# Altium PCB classyTKL_ALPS.PcbDoc (part 1 of 2)
Units mm, origin at the board's own origin, x right, y up, seen from the top; angles counter-clockwise.
Board outline 346.59 x 122.85 mm, 2 copper layers (Component Side, Bottom Layer), stack 1.571 mm thick; 201 components, 128 nets, 679 pads, 47 vias.
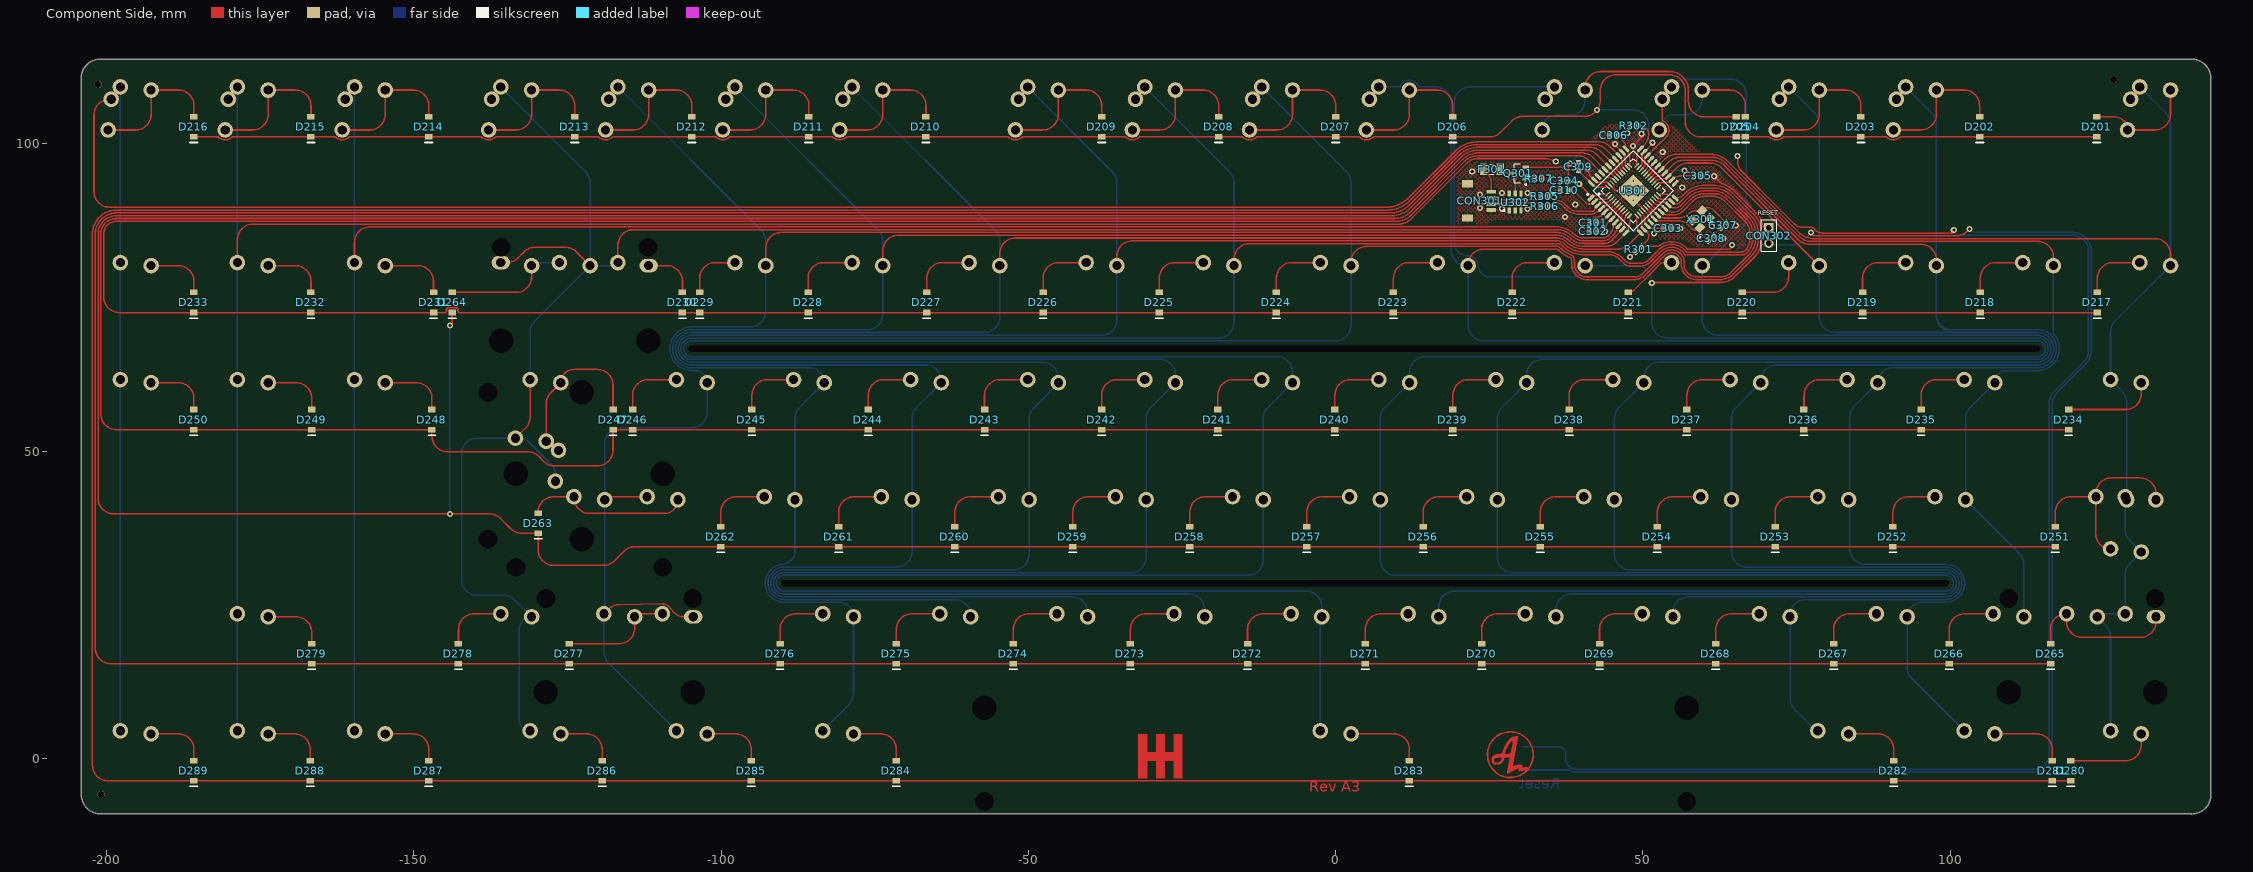
[diagram p0: Component Side view]
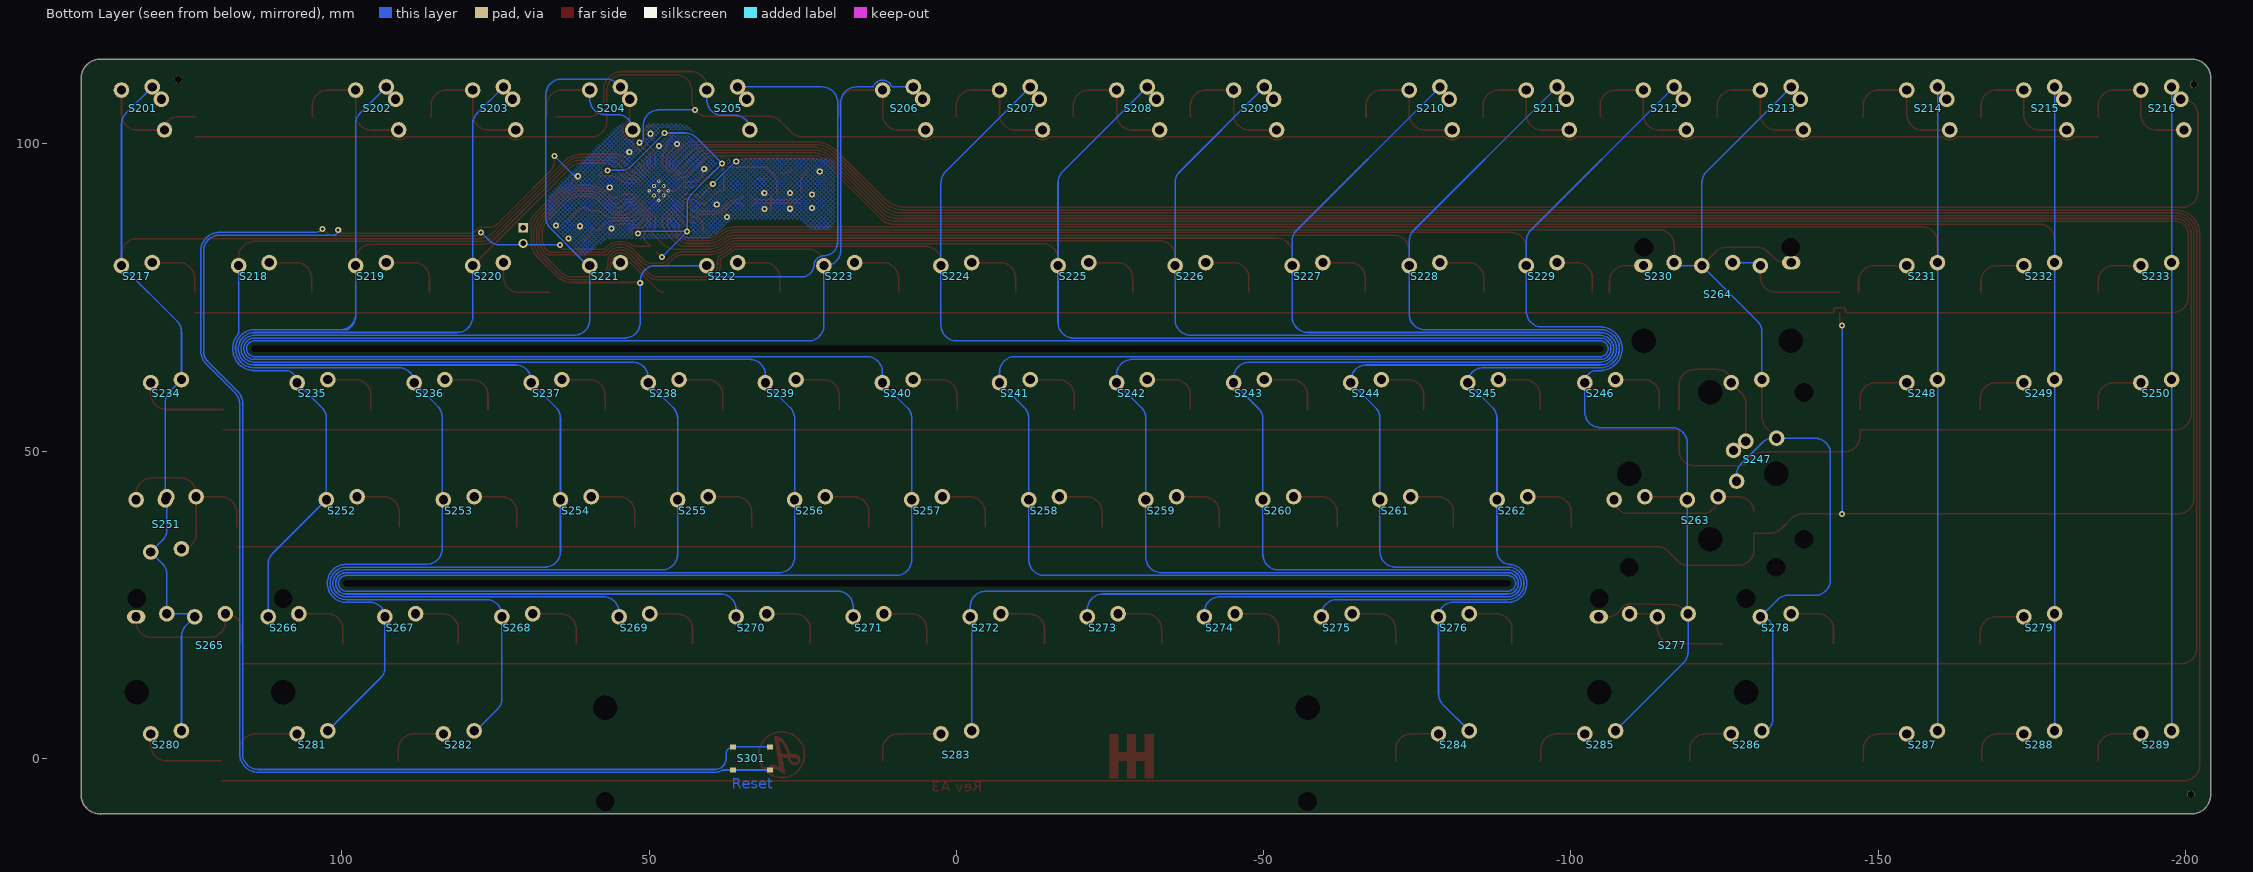
[diagram p1: Bottom Layer view, seen from below]
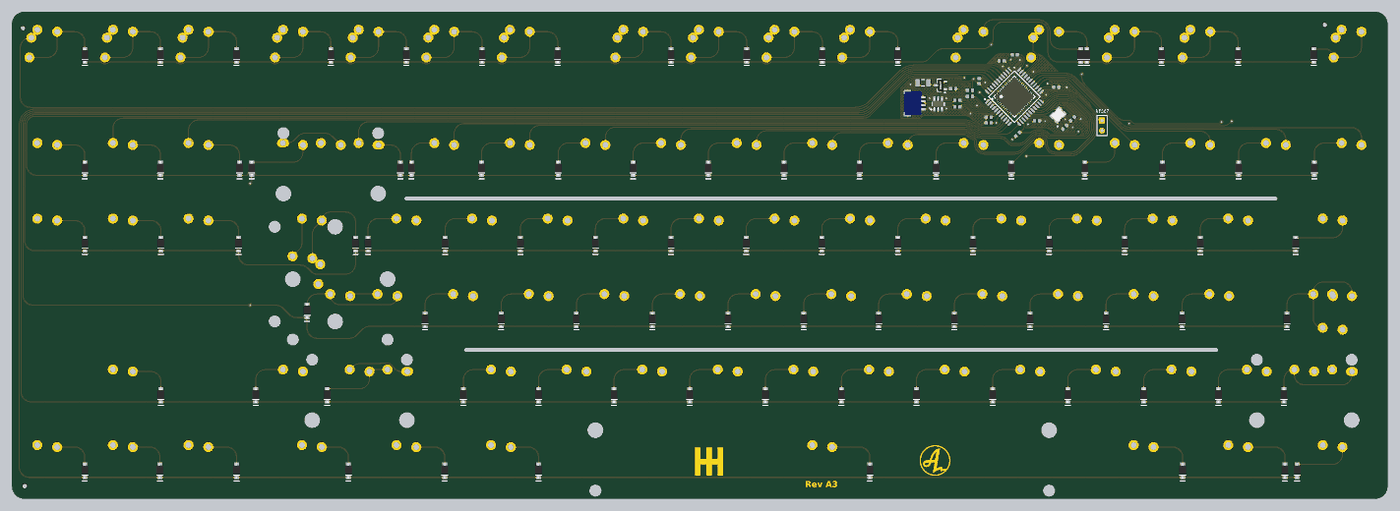
[diagram p3: 3D render of the assembled board from above, using the file's embedded part models]

## Layer stack, top to bottom
Top Solder: solder mask 0.0102, Solder Resist, Dk 3.5
Component Side: signal copper 0.0356
Dielectric 1: core 1.5, FR-4, Dk 4.2
Bottom Layer: signal copper 0.0356
Solder Side: solder mask 0.0102, Solder Resist, Dk 3.5

## Board outline
-204.127,-5.981 cw(c-204.032,-5.896) -204.159,-5.896 -204.159,110.685 cw(c-201.032,110.685) -201.032,113.812 cw(c-201.032,113.685) -200.974,113.798 139.295,113.798 cw(c139.295,110.671) 142.423,110.671 142.423,-5.883 cw(c142.299,-5.915) 142.427,-5.915 cw(c139.299,-5.915) 139.299,-9.042 cw(c139.299,-8.915) 139.233,-9.023 -201,-9.023 cw(c-201,-5.896)

## Design rules (kind name [scope] priority, off if disabled: settings)
Clearance [All] p1: gap=0.2 ignorepadtopadclearanceinfootprint=FALSE except(0: Arc-Hole Track-Hole SMDPad-Hole THPad-Hole Via-Hole Fill-Hole Poly-Hole Region-Hole Text-Hole; 0.254: THPad-THPad THPad-Via THPad-Fill THPad-Poly THPad-Region THPad-Text Via-Via Via-Fill Via-Poly Via-Region Via-Text Fill-Fill Fill-Poly Fill-Region Fill-Text Poly-Poly Poly-Region Poly-Text Region-Region Region-Text Text-Text)
ComponentClearance [InComponent('No Component') And OnLayer('Component Side')] p1: gap=0.254 collisioncheckmode=3 verticalgap=0.254 showdistances=FALSE
DiffPairsRouting DiffPairsRouting_USB [InDifferentialPairClass('All Differential Pairs')] p1: maxlimit=0.254 minlimit=0.203 mostfreqgap=0.203 toplayer_minwidth=0.152 toplayer_maxwidth=0.381 toplayer_prefwidth=0.152 bottomlayer_minwidth=0.152 bottomlayer_maxwidth=0.381 bottomlayer_prefwidth=0.152 maxuncoupledlength=12.7
DiffPairsRouting [All] p2: maxlimit=0.254 minlimit=0.254 mostfreqgap=0.254 toplayer_minwidth=0.381 toplayer_maxwidth=0.381 toplayer_prefwidth=0.381 bottomlayer_minwidth=0.381 bottomlayer_maxwidth=0.381 bottomlayer_prefwidth=0.381 maxuncoupledlength=12.7
HoleSize [All] p1: absolutevalues=TRUE maxlimit=20 minlimit=0.025 maxpercent=80.000 minpercent=20.000
MatchedLengths MatchedLengths_USB_DiffPairs_1 [All] p1: tolerance=0.127 checknetsindiffpair=TRUE checkdiffpairvsdiffpair=FALSE checkxsignals=FALSE checkothers=FALSE
MatchedLengths MatchedLengths_USB_DiffPairs [All] p2: tolerance=0.127 checknetsindiffpair=TRUE checkdiffpairvsdiffpair=FALSE checkxsignals=FALSE checkothers=FALSE
PolygonConnect PolygonConnect_1 [All vs IsVia] p1: connectstyle=Direct reliefconductorwidth=0.254 reliefentries=4 polygonreliefangle="90 Angle" airgapwidth=0.254
PolygonConnect [All] p2: connectstyle=Relief reliefconductorwidth=0.254 reliefentries=4 polygonreliefangle="90 Angle" airgapwidth=0.254
RoutingVias [All] p1: holewidth=0.711 width=1.27 viastyle="Through Hole" minholewidth=0.711 minwidth=1.27 maxholewidth=0.711 maxwidth=1.27
SolderMaskExpansion [All] p1: expansion=0.102 istentingtop=FALSE
Width [All] p1: maxlimit=0.254 minlimit=0.203 preferedwidth=0.254
27 further rules are at their usual default settings.

## Classes and differential pairs
component class Designator: C201 C202 C203 C204 C205 C206 D201 D202 D203 D204 D205 D206 D207 D208 D209 D210 D211 D212 D213 D214 D215 D216 D217 D218 D219 D220 D221 D222 D223 D224 D225 D226 D227 D228 D229 D230 D231 D232 D233 D234 D235 D236 D237 D238 D239 D240 D241 D242 D243 D244 D245 D246 D247 D248 D249 D250 D251 D252 D253 D254 D255 D256 D257 D258 D259 D260 D261 D262 D263 D264 D265 D266 D267 D268 D269 D270 D271 D272 D273 D274 D275 D276 D277 D278 D279 D280 D281 D282 D283 D284 D285 D286 D287 D288 D289 S201 S202 S203 S204 S205 S206 S207 S208 S209 S210 S211 S212 S213 S214 S215 S216 S217 S218 S219 S220 S221 S222 S223 S224 S225 S226 S227 S228 S229 S230 S231 S232 S233 S234 S235 S236 S237 S238 S239 S240 S241 S242 S243 S244 S245 S246 S247 S248 S249 S250 S251 S252 S253 S254 S255 S256 S257 S258 S259 S260 S261 S262 S263 S264 S265 S266 S267 S268 S269 S270 S271 S272 S273 S274 S275 S276 S277 S278 S279 S280 S281 S282 S283 S284 S285 S286 S287 S288 S289
differential pair D_PRE: +D_PRE_P -D_PRE_N
differential pair D: +D_P -D_N

## Components (designator, comment, footprint, x,y, rotation, side; value= is the part's Value field where it differs from the comment)
C301 "" C0603[1608] 41.915,87.178 r0 top value=1uF
C302 "" C0603[1608] 41.915,85.781 r0 top value=0.1uF
C303 "" C0603[1608] 54.107,86.289 r180 top value=0.1uF
C304 "" C0603[1608] 37.211,93.98 r0 top value=4,7uF
C305 "" C0603[1608] 58.933,94.798 r180 top value=0.1uF
C306 "" C0603[1608] 45.217,101.402 r0 top value=0.1uF
C307 "" C0603[1608] 63.076,86.749 r45 top value=15pF
C308 "" C0603[1608] 61.092,84.638 r225 top value=15pF
C309 "" C0603[1608] 39.502,96.322 r270 top value=0.1uF
C310 "" C0603[1608] 37.211,92.456 r0 top value=0.1uF
CON301 "Header 5" "JST SM04B-SRSS-TB" 21.468,93.54 r270 top
CON302 "Header 2" HDR1X2 70.485,86.36 r270 top
D201 "Diode" SOD-123 123.83,102.775 r90 top
D202 "Diode" SOD-123 104.78,102.775 r90 top
D203 "Diode" SOD-123 85.476,102.775 r90 top
D204 "Diode" SOD-123 66.68,102.775 r90 top
D205 "Diode" SOD-123 65.151,102.775 r90 top
D206 "Diode" SOD-123 19.055,102.775 r90 top
D207 "Diode" SOD-123 0.005,102.775 r90 top
D208 "Diode" SOD-123 -19.045,102.775 r90 top
D209 "Diode" SOD-123 -38.095,102.775 r90 top
D210 "Diode" SOD-123 -66.67,102.775 r90 top
D211 "Diode" SOD-123 -85.72,102.775 r90 top
D212 "Diode" SOD-123 -104.77,102.775 r90 top
D213 "Diode" SOD-123 -123.82,102.775 r90 top
D214 "Diode" SOD-123 -147.569,102.775 r90 top
D215 "Diode" SOD-123 -166.746,102.775 r90 top
D216 "Diode" SOD-123 -185.796,102.775 r90 top
D217 "Diode" SOD-123 123.957,74.2 r90 top
D218 "Diode" SOD-123 104.907,74.2 r90 top
D219 "Diode" SOD-123 85.73,74.2 r90 top
D220 "Diode" SOD-123 66.172,74.2 r90 top
D221 "Diode" SOD-123 47.63,74.2 r90 top
D222 "Diode" SOD-123 28.707,74.2 r90 top
D223 "Diode" SOD-123 9.403,74.2 r90 top
D224 "Diode" SOD-123 -9.647,74.2 r90 top
D225 "Diode" SOD-123 -28.697,74.2 r90 top
D226 "Diode" SOD-123 -47.62,74.2 r90 top
D227 "Diode" SOD-123 -66.543,74.2 r90 top
D228 "Diode" SOD-123 -85.847,74.2 r90 top
D229 "Diode" SOD-123 -103.5,74.2 r90 top
D230 "Diode" SOD-123 -106.294,74.2 r90 top
D231 "Diode" SOD-123 -146.807,74.2 r90 top
D232 "Diode" SOD-123 -166.746,74.2 r90 top
D233 "Diode" SOD-123 -185.796,74.2 r90 top
D234 "Diode" SOD-123 119.258,55.15 r90 top
D235 "Diode" SOD-123 95.255,55.15 r90 top
D236 "Diode" SOD-123 76.205,55.15 r90 top
D237 "Diode" SOD-123 57.155,55.15 r90 top
D238 "Diode" SOD-123 37.978,55.15 r90 top
D239 "Diode" SOD-123 19.055,55.15 r90 top
D240 "Diode" SOD-123 -0.122,55.15 r90 top
D241 "Diode" SOD-123 -19.172,55.15 r90 top
D242 "Diode" SOD-123 -38.095,55.15 r90 top
D243 "Diode" SOD-123 -57.145,55.15 r90 top
D244 "Diode" SOD-123 -76.068,55.15 r90 top
D245 "Diode" SOD-123 -94.991,55.15 r90 top
D246 "Diode" SOD-123 -114.422,55.15 r90 top
D247 "Diode" SOD-123 -117.597,55.15 r90 top
D248 "Diode" SOD-123 -147.061,55.15 r90 top
D249 "Diode" SOD-123 -166.619,55.15 r90 top
D250 "Diode" SOD-123 -185.796,55.15 r90 top
D251 "Diode" SOD-123 117.099,36.1 r90 top
D252 "Diode" SOD-123 90.683,36.1 r90 top
D253 "Diode" SOD-123 71.506,36.1 r90 top
D254 "Diode" SOD-123 52.329,36.1 r90 top
D255 "Diode" SOD-123 33.279,36.1 r90 top
D256 "Diode" SOD-123 14.229,36.1 r90 top
D257 "Diode" SOD-123 -4.694,36.1 r90 top
D258 "Diode" SOD-123 -23.744,36.1 r90 top
D259 "Diode" SOD-123 -42.794,36.1 r90 top
D260 "Diode" SOD-123 -61.971,36.1 r90 top
D261 "Diode" SOD-123 -80.894,36.1 r90 top
D262 "Diode" SOD-123 -100.071,36.1 r90 top
D263 "Diode" SOD-123 -129.789,38.283 r90 top
D264 "Diode" SOD-123 -143.759,74.2 r90 top
D265 "Diode" SOD-123 116.332,17.05 r90 top
D266 "Diode" SOD-123 99.827,17.05 r90 top
D267 "Diode" SOD-123 81.031,17.05 r90 top
D268 "Diode" SOD-123 61.854,17.05 r90 top
D269 "Diode" SOD-123 42.931,17.05 r90 top
D270 "Diode" SOD-123 23.754,17.05 r90 top
D271 "Diode" SOD-123 4.831,17.05 r90 top
D272 "Diode" SOD-123 -14.346,17.05 r90 top
D273 "Diode" SOD-123 -33.396,17.05 r90 top
D274 "Diode" SOD-123 -52.446,17.05 r90 top
D275 "Diode" SOD-123 -71.496,17.05 r90 top
D276 "Diode" SOD-123 -90.419,17.05 r90 top
D277 "Diode" SOD-123 -124.709,17.05 r90 top
D278 "Diode" SOD-123 -142.743,17.05 r90 top
D279 "Diode" SOD-123 -166.619,17.05 r90 top
D280 "Diode" SOD-123 119.639,-2 r90 top
D281 "Diode" SOD-123 116.591,-2 r90 top
D282 "Diode" SOD-123 90.81,-2 r90 top
D283 "Diode" SOD-123 12,-2 r90 top
D284 "Diode" SOD-123 -71.496,-2 r90 top
D285 "Diode" SOD-123 -95.118,-2 r90 top
D286 "Diode" SOD-123 -119.375,-2 r90 top
D287 "Diode" SOD-123 -147.569,-2 r90 top
D288 "Diode" SOD-123 -166.873,-2 r90 top
D289 "Diode" SOD-123 -185.796,-2 r90 top
F301 "Fuse" C1206[3216] 25.4,95.885 r0 top
Q301 "PMOS-2" SOT-23-3 29.718,95.25 r180 top
R301 "Res1" R0603[1608] 49.281,82.86 r45 top value=10K
R302 "Res1" R0603[1608] 48.514,102.997 r180 top value=10K
R305 "Res1" R0603[1608] 34.041,91.496 r180 top value=22
R306 "Res1" R0603[1608] 34.041,89.845 r180 top value=22
R307 "Res1" R0603[1608] 33.02,94.361 r0 top value=10K
S201 "MX" "Alps-switch - AEK F-row" 133.349,104.775 r180 bottom locked
S202 "MX" "Alps-switch - AEK F-row" 95.249,104.775 r180 bottom locked
S203 "MX" "Alps-switch - AEK F-row" 76.199,104.775 r180 bottom locked
S204 "MX" "Alps-switch - AEK F-row" 57.149,104.775 r180 bottom locked
S205 "MX" "Alps-switch - AEK F-row" 38.099,104.775 r180 bottom locked
S206 "MX" "Alps-switch - AEK F-row" 9.494,104.775 r180 bottom locked
S207 "MX" "Alps-switch - AEK F-row" -9.526,104.775 r180 bottom locked
S208 "MX" "Alps-switch - AEK F-row" -28.576,104.775 r180 bottom locked
S209 "MX" "Alps-switch - AEK F-row" -47.626,104.775 r180 bottom locked
S210 "MX" "Alps-switch - AEK F-row" -76.201,104.775 r180 bottom locked
S211 "MX" "Alps-switch - AEK F-row" -95.251,104.775 r180 bottom locked
S212 "MX" "Alps-switch - AEK F-row" -114.301,104.775 r180 bottom locked
S213 "MX" "Alps-switch - AEK F-row" -133.351,104.775 r180 bottom locked
S214 "MX" "Alps-switch - AEK F-row" -157.162,104.775 r180 bottom locked
S215 "MX" "Alps-switch - AEK F-row" -176.213,104.775 r180 bottom locked
S216 "MX" "Alps-switch - AEK F-row" -195.263,104.775 r180 bottom locked
S217 "MX" "Alps-switch - switched pol" 133.349,76.2 r180 bottom locked
S218 "MX" "Alps-switch - switched pol" 114.299,76.2 r180 bottom locked
S219 "MX" "Alps-switch - switched pol" 95.249,76.2 r180 bottom locked
S220 "MX" "Alps-switch - switched pol" 76.199,76.2 r180 bottom locked
S221 "MX" "Alps-switch - switched pol" 57.149,76.2 r180 bottom locked
S222 "MX" "Alps-switch - switched pol" 38.099,76.2 r180 bottom locked
S223 "MX" "Alps-switch - switched pol" 19.049,76.2 r180 bottom locked
S224 "MX" "Alps-switch - switched pol" -0.001,76.2 r180 bottom locked
S225 "MX" "Alps-switch - switched pol" -19.051,76.2 r180 bottom locked
S226 "MX" "Alps-switch - switched pol" -38.101,76.2 r180 bottom
S227 "MX" "Alps-switch - switched pol" -57.151,76.2 r180 bottom locked
S228 "MX" "Alps-switch - switched pol" -76.201,76.2 r180 bottom locked
S229 "MX" "Alps-switch - switched pol" -95.251,76.2 r180 bottom locked
S230 "MX" Alps-switch#1 -114.301,76.2 r180 bottom locked
S231 "MX" Alps-switch#2 -157.162,76.2 r180 bottom locked
S232 "MX" Alps-switch#2 -176.213,76.2 r180 bottom locked
S233 "MX" Alps-switch#2 -195.263,76.2 r180 bottom locked
S234 "MX" "ALPS-switch - 1.5U" 128.587,57.15 r180 bottom locked
S235 "MX" "Alps-switch - switched pol" 104.774,57.15 r180 bottom locked
S236 "MX" "Alps-switch - switched pol" 85.724,57.15 r180 bottom locked
S237 "MX" "Alps-switch - switched pol" 66.674,57.15 r180 bottom locked
S238 "MX" "Alps-switch - switched pol" 47.624,57.15 r180 bottom locked
S239 "MX" "Alps-switch - switched pol" 28.574,57.15 r180 bottom locked
S240 "MX" "Alps-switch - switched pol" 9.524,57.15 r180 bottom locked
S241 "MX" "Alps-switch - switched pol" -9.526,57.15 r180 bottom locked
S242 "MX" "Alps-switch - switched pol" -28.576,57.15 r180 bottom locked
S243 "MX" "Alps-switch - switched pol" -47.626,57.15 r180 bottom locked
S244 "MX" "Alps-switch - switched pol" -66.676,57.15 r180 bottom locked
S245 "MX" "Alps-switch - switched pol" -85.726,57.15 r180 bottom locked
S246 "MX" "Alps-switch - switched pol" -104.776,57.15 r180 bottom
S247 "MX" "ALPS-SWITCH - PIPE_ISO_ENTER" -128.588,57.15 r0 bottom locked
S248 "MX" Alps-switch#2 -157.162,57.15 r180 bottom locked
S249 "MX" Alps-switch#2 -176.213,57.15 r180 bottom locked
S250 "MX" Alps-switch#2 -195.263,57.15 r180 bottom locked
S251 "MX" "ALPS-switch - CAPS" 126.206,38.1 r180 bottom locked
S252 "MX" "Alps-switch - switched pol" 100.012,38.1 r180 bottom locked
S253 "MX" "Alps-switch - switched pol" 80.962,38.1 r180 bottom locked
S254 "MX" "Alps-switch - switched pol" 61.912,38.1 r180 bottom locked
S255 "MX" "Alps-switch - switched pol" 42.862,38.1 r180 bottom locked
S256 "MX" "Alps-switch - switched pol" 23.812,38.1 r180 bottom locked
S257 "MX" "Alps-switch - switched pol" 4.762,38.1 r180 bottom locked
S258 "MX" "Alps-switch - switched pol" -14.288,38.1 r180 bottom locked
S259 "MX" "Alps-switch - switched pol" -33.338,38.1 r180 bottom locked
S260 "MX" "Alps-switch - switched pol" -52.388,38.1 r180 bottom locked
S261 "MX" "Alps-switch - switched pol" -71.438,38.1 r180 bottom locked
S262 "MX" "Alps-switch - switched pol" -90.488,38.1 r180 bottom locked
S263 "MX" "ALPS-SWITCH - ENTER_ANSI_ISO_KEY" -121.451,38.1 r180 bottom locked
S264 "MX" "ALPS-switch - backspace" -123.826,76.2 r180 bottom locked
S265 "MX" "ALPS-switch - Left shift V2" 121.443,19.05 r180 bottom locked
S266 "MX" "Alps-switch - switched pol" 109.479,19.05 r180 bottom locked
S267 "MX" "Alps-switch - switched pol" 90.487,19.05 r180 bottom locked
S268 "MX" "Alps-switch - switched pol" 71.437,19.05 r180 bottom locked
S269 "MX" "Alps-switch - switched pol" 52.387,19.05 r180 bottom locked
S270 "MX" "Alps-switch - switched pol" 33.337,19.05 r180 bottom locked
S271 "MX" "Alps-switch - switched pol" 14.287,19.05 r180 bottom locked
S272 "MX" "Alps-switch - switched pol" -4.763,19.05 r180 bottom locked
S273 "MX" "Alps-switch - switched pol" -23.813,19.05 r180 bottom locked
S274 "MX" "Alps-switch - switched pol" -42.862,19.05 r180 bottom locked
S275 "MX" "Alps-switch - switched pol" -61.913,19.05 r180 bottom locked
S276 "MX" "Alps-switch - switched pol" -80.963,19.05 r180 bottom locked
S277 "MX" "ALPS-switch - right shift V2" -116.581,19.05 r180 bottom locked
S278 "MX" "Alps-switch - switched pol" -133.351,19.05 r180 bottom locked
S279 "MX" Alps-switch#2 -176.213,19.05 r180 bottom locked
S280 "MX" "ALPS-switch - 1.5U" 128.587,0 r180 bottom locked
S281 "MX" Alps-switch#2 104.775,0 r180 bottom
S282 "MX" "ALPS-switch - 1.5U" 80.962,0 r180 bottom
S283 "MX" "ALPS-SWITCH - 7U SPACE" 0,0 r0 bottom locked
S284 "MX" "ALPS-switch - 1.5U" -80.962,0 r180 bottom
S285 "MX" Alps-switch#2 -104.775,0 r180 bottom
S286 "MX" "ALPS-switch - 1.5U" -128.588,0 r180 bottom locked
S287 "MX" Alps-switch#2 -157.163,0 r180 bottom locked
S288 "MX" Alps-switch#2 -176.213,0 r180 bottom locked
S289 "MX" Alps-switch#2 -195.263,0 r180 bottom locked
S301 "SW-PB" "XKB Switch" 33.337,0 r180 bottom
U301 "ATMEGA32U4" ATMEGA32U4-COMBO 48.411,92.392 r45 top
U302 "SRV05" SOT-23-6 29.21,90.551 r90 top
X301 "XTAL" XTAL-3225 59.436,87.757 r45 top

## Footprints (in the part's own frame and the unit in brackets; to place one, negate y for a bottom-side part, rotate by r counter-clockwise, add the part's x,y. Pads: shape width x height; smd on the part's side, far side on the other; paste and mask are expansions set on the pad)
Alps-switch#1 [mm]
  oval 3x2.2 hole 1.499 mask+0.102: 1(-2.5,4)
  round 2.54 hole 1.499 mask+0.102: 2(2.5,4.5)
  round 1 on Mech14: ""(0,0)
Alps-switch#2 [mm]
  round 2.54 hole 1.499 mask+0.102: 1(-2.5,4) 2(2.5,4.5)
  round 1 on Mech14: ""(0,0)
"ALPS-switch - 1.5U" [mm]
  round 2.54 hole 1.499 mask+0.102: 1(-2.5,4) 2(2.5,4.5)
  round 1 on Mech14: ""(0,0)
"ALPS-SWITCH - 7U SPACE" [mil]
  round 100 hole 59 mask+4: 1(98.43,-157.48) 2(-98.43,-177.17)
  round 60 hole 157.01 unplated: ""(-2250,-325) ""(2250,-325)
  round 60 hole 120 unplated: ""(-2250,275) ""(2250,275)
  round 39.37 on Mech14: ""(0,0)
"Alps-switch - AEK F-row" [mm]
  round 2.54 hole 1.499 mask+0.102: 1(-2.5,4) 1(4.5,-2.5) 2(2.5,4.5) 2(4,2.5)
  round 1 on Mech14: ""(0,0)
"ALPS-switch - backspace" [mil]
  round 100 hole 59 mask+4: 1(98.43,177.17) 1(276.57,157.48) 2(-98.43,157.48)
  oval 118.11x86.61 hole 59 mask+4: 2(473.43,177.17)
  round 60 hole 157.01 unplated: ""(-470,-325) ""(470,-325)
  round 60 hole 120 unplated: ""(-470,275) ""(470,275)
  round 39.37 on Mech14: ""(0,0) ""(375,0)
"ALPS-switch - CAPS" [mm]
  round 2.54 hole 1.499 mask+0.102: 1(-7.263,4) 1(0.119,-4) 1(2.5,4.5) 2(-4.881,-4.5) 2(-2.5,4) 2(-2.262,4.5)
  round 1 on Mech14: ""(-4.763,0) ""(-2.381,0) ""(0,0)
"ALPS-SWITCH - ENTER_ANSI_ISO_KEY" [mil]
  round 100 hole 59 mask+4: 1(-567.18,157.48) 1(98.43,177.17) 2(-370.32,177.17) 2(-98.43,157.48)
  round 60 hole 120 unplated: ""(-470,-275) ""(470,-275)
  round 60 hole 157.01 unplated: ""(-470,325) ""(470,325)
  round 39.37 on Mech14: ""(-468.75,0) ""(-468.75,0) ""(0,0) ""(0,0)
"ALPS-switch - Left shift V2" [mil]
  oval 118.11x86.61 hole 59 mask+4.02: 1(-473.43,157.48)
  round 100 hole 59 mask+4: 1(98.43,177.17) 2(-276.57,177.17)
  round 100 hole 59 mask+4.02: 2(-98.43,157.48)
  round 60 hole 157.01 unplated: ""(-470,-325) ""(470,-325)
  round 60 hole 120 unplated: ""(-470,275) ""(470,275)
  round 39.37 on Mech14: ""(-375,0) ""(0,0)
"ALPS-SWITCH - PIPE_ISO_ENTER" [mil]
  round 100 hole 59 mask+4: 1(4.68,217.52) 1(83.42,276.57) 1(98.43,-157.48) 2(-192.18,197.83) 2(-98.43,-177.17) 2(63.73,473.43)
  round 60 hole 120 unplated: ""(-368.75,-95) ""(-368.75,845)
  round 39.37 on Mech14: ""(-93.75,375) ""(-93.75,375) ""(0,0) ""(0,0)
  round 60 hole 157.01 unplated: ""(231.25,-95) ""(231.25,845)
"ALPS-switch - right shift V2" [mil]
  round 100 hole 59 mask+4: 1(-276.57,177.17) 1(-98.43,157.48) 2(98.43,177.17)
  oval 118.11x86.61 hole 59 mask+4: 2(-473.43,157.48)
  round 60 hole 157.01 unplated: ""(-470,-325) ""(470,-325)
  round 60 hole 120 unplated: ""(-470,275) ""(470,275)
  round 39.37 on Mech14: ""(-375,0) ""(0,0)
"Alps-switch - switched pol" [mm]
  round 2.54 hole 1.499 mask+0.102: 1(2.5,4.5) 2(-2.5,4)
  round 1 on Mech14: ""(0,0)
ATMEGA32U4-COMBO [mm] "QFP, 44-Leads, Body 9,95x9,95mm, Pitch 0,80mm, IPC Medium Density"
  rect 1.35x0.5 smd: 1(-5.675,4)
  oval 1.05x0.25 smd: 1(-3.325,2.5) 2(-3.325,2) 3(-3.325,1.5) 4(-3.325,1) 5(-3.325,0.5) 6(-3.325,0) 7(-3.325,-0.5) 8(-3.325,-1) 9(-3.325,-1.5) 10(-3.325,-2) 11(-3.325,-2.5) 23(3.325,-2.5) 24(3.325,-2) 25(3.325,-1.5) 26(3.325,-1) 27(3.325,-0.5) 28(3.325,0) 29(3.325,0.5) 30(3.325,1) 31(3.325,1.5) 32(3.325,2) 33(3.325,2.5)
  oval 1.35x0.5 smd: 2(-5.675,3.2) 3(-5.675,2.4) 4(-5.675,1.6) 5(-5.675,0.8) 6(-5.675,0) 7(-5.675,-0.8) 8(-5.675,-1.6) 9(-5.675,-2.4) 10(-5.675,-3.2) 11(-5.675,-4) 23(5.675,-4) 24(5.675,-3.2) 25(5.675,-2.4) 26(5.675,-1.6) 27(5.675,-0.8) 28(5.675,0) 29(5.675,0.8) 30(5.675,1.6) 31(5.675,2.4) 32(5.675,3.2) 33(5.675,4)
  oval 0.5x1.35 smd: 12(-4,-5.675) 13(-3.2,-5.675) 14(-2.4,-5.675) 15(-1.6,-5.675) 16(-0.8,-5.675) 17(0,-5.675) 18(0.8,-5.675) 19(1.6,-5.675) 20(2.4,-5.675) 21(3.2,-5.675) 22(4,-5.675) 34(4,5.675) 35(3.2,5.675) 36(2.4,5.675) 37(1.6,5.675) 38(0.8,5.675) 39(0,5.675) 40(-0.8,5.675) 41(-1.6,5.675) 42(-2.4,5.675) 43(-3.2,5.675) 44(-4,5.675)
  oval 0.25x1.05 smd: 12(-2.5,-3.325) 13(-2,-3.325) 14(-1.5,-3.325) 15(-1,-3.325) 16(-0.5,-3.325) 17(0,-3.325) 18(0.5,-3.325) 19(1,-3.325) 20(1.5,-3.325) 21(2,-3.325) 22(2.5,-3.325) 34(2.5,3.325) 35(2,3.325) 36(1.5,3.325) 37(1,3.325) 38(0.5,3.325) 39(0,3.325) 40(-0.5,3.325) 41(-1,3.325) 42(-1.5,3.325) 43(-2,3.325) 44(-2.5,3.325)
  rect 3.81x3.81 smd paste-1000: 43(0,0)
  silkscreen extent -5.8,-4.6 4.6,4.92, body extent -3.6,-3.6 3.6,3.6, height 1
C0603[1608] [mm] "Chip Resistor, 2-Leads, Body 1,57x0,80mm, IPC Medium Density"
  rect 0.8x0.85 smd: 1(-0.65,0) 2(0.65,0)
  body extent -0.83,-0.43 0.82,0.43, height 0.5
C1206[3216] [mm]
  rect 1.2x1.8 smd: 1(-1.35,0) 2(1.35,0)
  silkscreen extent -0.35,-0.8 0.35,0.8, body extent -1.6,-0.9 1.6,0.9, height 1.2
HDR1X2 [mm] "Connector; Header; 2 Position"
  rect 1.5x1.5 hole 0.9 mask+0.102: 1(0,0)
  round 1.5 hole 0.9 mask+0.102: 2(2.54,0)
  silkscreen extent -1.27,-1.27 3.81,1.27
"JST SM04B-SRSS-TB" [mm]
  rect 0.6x1.55 smd: 1(1.3,3.875) 2(2.3,3.875) 3(3.3,3.875) 4(4.3,3.875)
  rect 1.2x1.8 smd: 5(0,0) 5(5.6,0)
  body extent -0.21,-0.76 5.79,4.19, height 3.25
R0603[1608] [mm] "Chip Resistor, 2-Leads, Body 1,57x0,80mm, IPC Medium Density"
  rect 0.8x0.85 smd: 1(-0.65,0) 2(0.65,0)
  body extent -0.83,-0.43 0.82,0.43, height 0.5
SOD-123 [mm]
  rect 0.91x1.22 smd: 1(1.635,0) 2(-1.635,0)
  silkscreen extent -2.54,-0.64 -2.54,0.63, body extent -1.87,-0.85 1.88,0.85, height 1.2
SOT-23-3 [mm] "3.3v regulator, used in Windsond S2 proto 1"
  rect 1x0.55 smd: 1(-1.2,0.95) 2(-1.2,-0.95) 3(1.2,0)
  silkscreen extent -1.33,-1.55 0.7,1.95, body extent -1.45,-1.5 1.1,1.5, height 1
SOT-23-6 [mm]
  rect 1x0.55 smd: 1(-1.375,0.95) 2(-1.375,0) 3(-1.375,-0.95) 4(1.375,-0.95) 5(1.375,0) 6(1.375,0.95)
  silkscreen extent -1.5,-1.55 0.46,1.92, body extent -1.37,-1.44 1.47,1.49, height 1.05
"XKB Switch" [mm] "XKB Enterprise TS-1187A-C-D-B"
  rect 1x0.75 smd: 1(-3,1.875) 1(3,1.875) 2(-3,-1.875) 2(3,-1.875)
  body extent -3.25,-2.55 3.25,2.55, height 2
XTAL-3225 [mm]
  rect 1.4x1.2 smd: 1(-1.1,-0.85) 2(1.1,-0.85) 3(1.1,0.85) 4(-1.1,0.85)
  silkscreen extent -2.28,-2.03 -2.03,-1.78, body extent -1.6,-1.25 1.6,1.25, height 0.65

## Part data
C301: library part Cap, "Capacitor", LCSC MFG="Samsung Electro-Mechanics", LCSC Part #=C15849, MFG=KEMET, MFGPN=C0603C104M5RACTU, MRF.Part=CL10A105KB8NNNC, Version="0603 imperial"
C302 C303 C305 C306 C309 C310: library part Cap, "Capacitor", LCSC MFG=YAGEO, LCSC Part #=C14663, MFG=KEMET, MFGPN=C0603C104M5RACTU, MRF.Part=CC0603KRX7R9BB104, Version="0603 imperial"
C304: library part Cap, "Capacitor", LCSC MFG="Samsung Electro-Mechanics", LCSC Part #=C19666, MRF.Part=CL10A475KO8NNNC
C307 C308: library part Cap, "Capacitor", LCSC MFG="Samsung Electro-Mechanics", LCSC Part #=C1644, MRF.Part=CL10C150JB8NNNC, Version="0603 imperial"
CON301: "JST for USB daughter board", LCSC MFG="JST Sales America", LCSC Part #=C160404, MFG="JST Sales America Inc.", MFGPN=SM04B-SRSS-TB(LF)(SN), MRF.Part=SM04B-SRSS-TB(LF)(SN)
CON302: "Header, 2-Pin"
D201 D202 D203 D204 D205 D206 D207 D208 D209 D210 D211 D212 D213 D214 D215 D216 D217 D218 D219 D220 D221 D222 D223 D224 D225 D226 D227 D228 D229 D230 D231 D232 D233 D234 D235 D236 D237 D238 D239 D240 D241 D242 D243 D244 D245 D246 D247 D248 D249 D250 D251 D252 D253 D254 D255 D256 D257 D258 D259 D260 D261 D262 D263 D264 D265 D266 D267 D268 D269 D270 D271 D272 D273 D274 D275 D276 D277 D278 D279 D280 D281 D282 D283 D284 D285 D286 D287 D288 D289: "Default Diode", LCSC MFG=ST(Semtech), LCSC Part #=C81598, MRF.Part=1N4148W, Version=SOD-123
F301: library part "Fuse Thermal", "Thermal Fuse", LCSC MFG="Shenzhen JDT Fuse", LCSC Part #=C135338, MFG="Bel Fuse Inc.", MFGPN=0ZCJ0050FF2G, MRF.Part=ASMD1206-050
Q301: "P-Channel Power MOSFET", LCSC MFG="Vishay Intertech", LCSC Part #=C10487, MRF.Part=SI2301CDS-T1-GE3, Version=SOT23-3
R301 R302 R307: "Resistor", LCSC MFG="Uniroyal Elec", LCSC Part #=C25804, MFG="Panasonic Electronic Components", MFGPN=ERJ-3EKF5101V, MRF.Part=0603WAF1002T5E, Version="0603 imperial"
R305 R306: "Resistor", LCSC MFG="Uniroyal Elec", LCSC Part #=C23345, MFG="Panasonic Electronic Components", MFGPN=ERJ-3EKF5101V, MRF.Part=0603WAF220JT5E, Version="0603 imperial"
S201 S202 S203 S204 S205 S206 S207 S208 S209 S210 S211 S212 S213 S214 S215 S216 S217 S218 S219 S220 S221 S222 S223 S224 S225 S226 S227 S228 S229 S230 S231 S232 S233 S235 S236 S237 S238 S239 S240 S241 S242 S243 S244 S245 S246 S247 S248 S249 S250 S251 S252 S253 S254 S255 S256 S257 S258 S259 S260 S261 S262 S263 S264 S265 S266 S267 S268 S269 S270 S271 S272 S273 S274 S275 S276 S277 S278 S279 S280 S281 S282 S283 S284 S285 S286 S287 S288 S289: library part SW-PB, "Switch"
S234: library part SW-PB, "TAB"
S301: "Switch", LCSC MFG="XKB Enterprise", LCSC Part #=C318888, MFG=C&K, MFGPN="PTS645SM43SMTR92 LFS", MRF.Part=TS-1187A-C-D-B
U301: "MCU", LCSC MFG="Microchip Tech", LCSC Part #=C45874, MFG="Microchip Technology", MFGPN=ATMEGA32U4-MUR, MRF.Part=ATMEGA32U4-MUR
U302: LCSC MFG="ProTek Devices", LCSC Part #=C85364, MRF.Part=SRV05-4-P-T7
X301: "Crystal Oscillator", LCSC MFG="Yangxing Tech", LCSC Part #=C13738, MRF.Part=X322516MLB4SI

## Free pads (board coordinates)
  round 1.152 hole 1.152 unplated paste+0.148 mask+0.148: ""(-201.38,109.658) ""(-200.914,-5.842) ""(126.619,110.49)
  round 0 hole 1 slot 220 at 0 deg unplated mask+0.15: ""(4.704,66.675)
  round 0 hole 1 slot 190 at 0 deg unplated mask+0.15: ""(4.763,28.504)

## Via types
v1: diameter 1, hole 0.5, Component Side to Bottom Layer, tented both sides, 38 vias
v2: diameter 0.6, hole 0.3, Component Side to Bottom Layer, tented bottom, 9 vias

## Nets (pads, with @x,y where several pads share a name; then routed paths per layer and width w, separated by ;. In a path a pad name is that pad's centre, name@x,y a point inside that pad or via, vN(x,y) a via of type N, cw(c..) or ccw(c..) an arc to the next point about the centre after c; other vN are vias at no path point)
caps_led: U301.29 | length 2.4
  Component Side w0.254: U301.29@50.408,95.096 51.117,95.805 ccw(c50.656,96.266) 51.308,96.266 cw(c51.68,96.266) 51.417,96.529 U301.29@51.858,96.97
col1: S201.2 S217.2 S234.2 S251.2 S265.2 S280.2 U301.28 | length 214.5
  Component Side w0.254: U301.28@50.762,94.743 U301.28@52.423,96.404 53.575,97.556 cw(c55.371,95.76) 55.371,98.3 61.075,98.3 cw(c61.075,94.398) 63.833,97.158 cw(c61.075,94.398) 63.835,97.157 75.387,85.605 ccw(c77.825,88.043) 77.825,84.595 133.309,84.595 cw(c133.309,82.055) 135.849,82.055 S217.2@135.849,80.2 ; S217.2@135.774,80.125 S217.2@135.992,79.908
  Bottom Layer w0.254: S280.2@126.087,4.5 126.087,19.854 ccw(c123.547,19.854) 125.343,21.65 S265.2@123.943,23.05 124.443,23.55 S265.2@128.468,23.55 128.468,29.929 cw(c131.008,29.929) 129.212,31.725 S251.2@131.087,33.6 129.212,35.475 cw(c131.008,37.271) 128.468,37.271 S251.2@128.468,42.6 ; S251.2@128.706,42.1 128.706,57.979 ccw(c126.166,57.979) 127.962,59.775 S234.2@126.087,61.65 126.087,69.385 cw(c128.627,69.385) 126.831,71.181 S217.2@135.849,80.2 135.849,103.223 ccw(c133.309,103.223) 135.106,105.019 S201.2@130.849,109.275
col2: S218.2 S235.2 S252.2 S266.2 U301.27 | length 146.4
  Component Side w0.254: U301.27@51.115,94.389 51.828,95.102 cw(c52.19,94.74) 52.19,95.252 ccw(c52.19,95.764) 52.552,95.402 U301.27@52.989,95.839 54.253,97.102 cw(c56.049,95.306) 56.049,97.846 61.075,97.846 cw(c61.075,94.398) 63.513,96.836 75.332,85.018 ccw(c77.449,87.135) 77.449,84.141 114.259,84.141 cw(c114.259,81.601) 116.799,81.601 S218.2@116.799,80.2
  Bottom Layer w0.254: S266.2@111.979,23.05 111.979,31.58 ccw(c109.439,31.58) 111.236,33.376 S252.2@102.512,42.1 102.512,55.335 cw(c105.052,55.335) 103.256,57.131 S235.2@107.274,61.15 cw(c109.249,61.15) 109.249,63.124 114.204,63.124 ccw(c114.204,66.675) 116.182,63.726 ccw(c114.204,66.675) 117.406,65.139 ccw(c114.204,66.675) 117.755,66.671 ccw(c114.204,66.675) 117.755,66.679 117.755,66.959 ccw(c117.301,66.959) 117.735,67.094 cw(c117.977,67.17) 117.734,67.095 cw(c117.977,67.17) 117.725,67.137 ccw(c114.204,66.675) 117.569,67.81 ccw(c114.204,66.675) 116.863,69.029 cw(c117.053,69.197) 116.799,69.197 116.799,72.39 S218.2@116.799,80.2
col3: S202.2 S219.2 S236.2 S253.2 S267.2 S281.2 U301.26 | length 244.8
  Component Side w0.254: U301.26@51.469,94.036 51.921,94.488 cw(c52.67,93.74) 52.67,94.798 52.705,94.798 ccw(c52.705,95.703) 53.345,95.063 U301.26@53.555,95.273 54.895,96.613 cw(c56.691,94.817) 56.691,97.357 61.11,97.357 cw(c61.11,94.363) 63.227,96.481 ; 63.227,96.48 75.277,84.431 ccw(c77.073,86.227) 77.073,83.687 95.209,83.687 cw(c95.209,81.147) 97.749,81.147 S219.2@97.749,80.2
  Bottom Layer w0.254: S202.2@92.334,107.275 92.334,109.48 S202.2@92.709,109.855 ; S202.2@92.749,109.275 97.006,105.019 cw(c95.209,103.223) 97.749,103.223 S219.2@97.749,80.2 97.749,72.312 ; 101.075,31.015 ccw(c99.262,28.504) 99.262,31.601 86.213,31.601 cw(c86.213,34.141) 83.673,34.141 83.673,55.546 cw(c86.213,55.546) 83.675,55.656 cw(c86.213,55.546) 84.417,57.342 S236.2@88.224,61.15 cw(c90.653,61.15) 90.653,63.578 114.204,63.578 ccw(c114.204,66.675) 116.135,64.253 ccw(c114.204,66.675) 116.997,65.335 ccw(c114.204,66.675) 117.301,66.671 ccw(c114.204,66.675) 117.301,66.679 ; 101.076,31.015 cw(c99.262,28.504) 102.359,28.504 cw(c99.262,28.504) 100.323,25.594 ccw(c100.41,25.356) 100.315,25.591 cw(c99.365,27.947) 99.365,25.407 95.344,25.407 ccw(c95.344,23.05) S267.2@92.987,23.05 92.987,14.84 ccw(c95.527,14.84) 93.731,13.044 S281.2@102.275,4.5 ; 117.266,67.14 cw(c114.204,66.675) 117.301,66.679 ; 117.288,66.959 ccw(c114.204,66.675) 116.519,68.732 ccw(c114.204,66.675) 115.429,69.519 ccw(c114.204,66.675) 114.204,69.772 113.792,69.772 102.997,69.772 ; 117.301,66.959 117.301,66.679 ; 97.749,72.312 ccw(c100.289,72.312) 100.289,69.772 102.997,69.772 ; 97.749,72.312 97.749,72.009 ccw(c100.289,72.009) 99.026,69.806 ccw(c99.152,70.026) 99.152,69.772 102.997,69.772
col4: S203.2 S220.2 S237.2 S254.2 S268.2 S282.2 U301.25 | length 288.2
  Component Side w0.254: U301.25@51.822,93.682 52.197,94.057 cw(c52.761,93.493) 52.761,94.29 53.113,94.29 ccw(c53.113,95.715) U301.25@54.121,94.707 ; U301.25@54.121,94.707 55.572,96.159 cw(c57.368,94.363) 57.368,96.903 60.944,96.903 cw(c60.944,94.363) 62.74,96.159 S220.2@78.699,80.2
  Bottom Layer w0.254: S203.2@73.699,109.275 77.956,105.019 cw(c76.159,103.223) 78.699,103.223 S220.2@78.699,80.2 78.699,71.858 ccw(c81.239,71.858) 81.239,69.318 83.693,69.318 114.204,69.318 cw(c114.204,66.675) 116.847,66.679 cw(c114.204,66.675) 116.847,66.671 cw(c114.204,66.675) 114.204,64.032 71.714,64.032 ccw(c71.714,61.492) 69.174,61.492 S237.2@69.174,61.15 65.156,57.131 ccw(c66.952,55.335) 64.412,55.335 S254.2@64.412,42.1 64.412,33.687 ccw(c66.952,33.687) 66.952,31.147 99.262,31.147 cw(c99.262,28.504) 101.905,28.504 cw(c99.262,28.504) 99.262,25.861 76.477,25.861 ccw(c76.477,23.321) 73.937,23.321 S268.2@73.937,23.05 ; S268.2@73.949,23.061 ccw(c76.477,22.821) 73.937,22.821 73.937,9.815 ccw(c76.477,9.815) 74.138,8.824 ccw(c76.477,9.815) 74.681,8.019 S282.2@78.7,4
col5: S204.2 S221.2 S238.2 S255.2 S269.2 U301.31 | length 335.5
  Component Side w0.254: U301.31@49.701,95.803 50.033,96.135 ccw(c49.394,96.774) 50.297,96.774 50.297,97.282 cw(c51.24,97.282) 50.573,97.948 U301.31@50.726,98.101 52.339,99.714 52.344,99.719 53.775,101.142 ccw(c52.649,102.275) 53.793,101.16 ccw(c52.649,102.275) 53.3,103.733 cw(c53.404,103.965) 53.149,103.965 S204.2@53.149,107.275 ; S204.2@54.307,109.553 S204.2@54.609,109.855
  Bottom Layer w0.254: S204.2@54.649,109.275 55.177,109.802 cw(c56.973,108.006) 56.973,110.546 64.262,110.546 cw(c64.262,108.006) 66.802,108.006 66.802,88.098 cw(c64.262,88.098) 66.058,86.302 59.956,80.2 S221.2@59.649,80.2 59.649,71.404 ccw(c62.189,71.404) 62.189,68.864 63.881,68.864 114.204,68.864 cw(c114.204,66.675) 116.393,66.678 cw(c114.204,66.675) 116.393,66.672 cw(c114.204,66.675) 114.204,64.486 52.664,64.486 ccw(c52.664,61.946) 50.124,61.946 S238.2@50.124,61.15 46.106,57.131 ccw(c47.902,55.335) 45.362,55.335 S255.2@45.362,42.1 45.362,33.233 ccw(c47.902,33.233) 47.902,30.693 99.262,30.693 cw(c99.262,28.504) 101.451,28.504 cw(c99.262,28.504) 99.262,26.315 57.427,26.315 ccw(c57.427,23.775) 54.887,23.775 S269.2@54.887,23.05
col6: S205.2 S222.2 S239.2 S256.2 S270.2 U301.22 | length 460.5
  Component Side w0.254: S222.2@40.599,80.2 S222.2@40.638,80.239 ; v1(51.44,77.399) 51.494,77.453 62.548,77.453 ccw(c62.548,80.901) 64.986,78.463 68.177,81.654 ccw(c65.695,84.135) 69.204,84.135 69.204,85.771 ccw(c65.378,85.771) 68.085,88.476 ccw(c65.378,85.771) 68.084,88.477 64.563,91.998 ccw(c61.482,88.918) 61.482,93.274 59.941,93.274 ccw(c59.941,88.918) 56.86,91.998 56.515,91.653 cw(c55.439,92.729) 55.439,91.207 U301.22@55.252,91.207 ccw(c53.801,89.756) 53.801,91.808 U301.22@52.53,91.808
  Bottom Layer w0.254: S205.2@35.599,109.275 21.849,109.275 ccw(c21.849,106.735) 19.309,106.735 19.309,84.424 ccw(c21.849,84.424) 19.319,84.202 19.319,84.071 ccw(c21.594,84.071) 21.538,81.797 ccw(c21.544,82.051) 21.545,81.797 cw(c21.549,80.2) 21.593,81.796 cw(c21.549,80.2) 23.129,80.439 cw(c21.549,80.2) 23.129,80.437 cw(c21.549,80.2) 23.146,80.186 ccw(c23.4,80.184) 23.146,80.181 23.147,80.165 ccw(c25.208,80.439) 25.208,78.359 38.759,78.359 ccw(c38.759,80.2) S222.2@40.599,80.2 48.9,80.2 cw(c48.9,77.66) 51.44,77.66 v1(51.44,77.399) 51.44,70.95 ccw(c53.98,70.95) 53.515,68.453 ccw(c53.98,70.95) 53.98,68.41 58.293,68.41 114.204,68.41 cw(c114.204,66.675) 115.939,66.678 cw(c114.204,66.675) 115.939,66.672 cw(c114.204,66.675) 114.204,64.94 33.614,64.94 ccw(c33.614,62.4) 31.074,62.4 S239.2@31.074,61.15 27.056,57.131 ccw(c28.852,55.335) 26.312,55.335 S256.2@26.312,42.1 26.312,32.779 ccw(c28.852,32.779) 28.852,30.239 99.262,30.239 cw(c99.262,28.504) 100.997,28.504 cw(c99.262,28.504) 99.262,26.769 38.377,26.769 ccw(c38.377,24.229) 35.837,24.229 S270.2@35.837,23.05
col7: S206.2 S223.2 S240.2 S257.2 S271.2 U301.21 | length 553.9
  Component Side w0.254: S223.2@21.549,80.2 21.549,80.337 cw(c24.089,80.337) 24.089,82.877 35.995,82.877 cw(c35.995,82.604) 36.19,82.795 ccw(c36.511,83.116) 36.193,82.792 ccw(c40.34,86.949) 36.399,82.596 ; 36.994,82.124 ccw(c40.34,86.949) 37.734,81.687 cw(c40.34,86.949) 36.993,82.124 ; U301.21@52.176,91.455 52.476,91.154 ccw(c52.832,91.51) 52.832,91.007 53.804,91.007 cw(c53.804,89.759) U301.21@54.686,90.641 ; 53.449,81.753 cw(c54.649,80.7) 53.602,81.906 ; U301.21@54.686,90.641 54.91,90.417 ccw(c55.372,90.879) 55.372,90.226 ccw(c55.372,91.091) 55.984,90.479 57.181,91.677 cw(c59.941,88.918) 57.182,91.678 cw(c59.941,88.918) 59.941,92.82 61.482,92.82 cw(c61.482,88.918) 64.241,91.678 cw(c61.482,88.918) 64.242,91.677 67.63,88.289 ; 64.664,78.783 cw(c62.548,80.901) 62.548,77.907 58.785,77.907 cw(c58.785,80.447) 56.245,80.447 56.245,80.635 ccw(c54.649,80.7) 53.448,81.753 cw(c53.258,81.921) 53.438,81.741 52.851,81.154 50.347,78.651 cw(c48.551,80.447) 48.551,77.907 40.892,77.907 cw(c40.892,80.391) 38.974,78.813 cw(c40.892,80.391) 38.408,80.391 38.408,80.918 ccw(c37.346,80.918) 38.311,81.361 ccw(c38.08,81.255) 38.174,81.491 cw(c40.34,86.949) 37.785,81.662 cw(c40.34,86.949) 36.993,82.124 ; 64.665,78.784 67.723,81.842 ccw(c65.241,84.324) 68.75,84.324 68.75,85.583 ccw(c64.924,85.583) 67.63,88.289 ; 36.399,82.596 ccw(c40.34,86.949) 36.993,82.124 ; 36.399,82.596 cw(c40.34,86.949) 36.317,82.672 ccw(c40.34,86.949) 36.399,82.596 ; 36.399,82.596 ccw(c40.34,86.949) 36.993,82.124
  Bottom Layer w0.254: S206.2@6.994,109.275 7.498,109.275 10.304,109.275 ccw(c10.304,109.529) 10.536,109.426 cw(c11.994,108.775) 13.453,109.426 ccw(c13.685,109.529) 13.685,109.275 16.256,109.275 cw(c16.256,106.735) 18.796,106.735 18.796,82.74 ccw(c21.336,82.74) 21.336,80.2 S223.2@21.549,80.2 21.549,70.485 ccw(c24.089,70.485) 23.84,67.957 ccw(c23.866,68.21) 23.864,67.956 114.204,67.956 cw(c114.204,66.675) 115.485,66.678 cw(c114.204,66.675) 115.485,66.672 cw(c114.204,66.675) 114.204,65.394 14.564,65.394 ccw(c14.564,62.854) 12.024,62.854 S240.2@12.024,61.15 8.006,57.131 ccw(c9.802,55.335) 7.262,55.335 S257.2@7.262,42.1 7.262,32.325 ccw(c9.802,32.325) 9.802,29.785 99.262,29.785 cw(c99.262,28.504) 100.543,28.504 cw(c99.262,28.504) 99.262,27.223 19.327,27.223 ccw(c19.327,24.683) 16.787,24.683 S271.2@16.787,23.05
col8: S207.2 S224.2 S241.2 S258.2 S272.2 S283.2 U301.20 | length 582.6
  Component Side w0.254: S224.2@2.499,80.2 2.499,80.791 cw(c5.039,80.791) 5.039,83.331 35.995,83.331 cw(c35.995,82.604) 36.511,83.116 ccw(c40.34,86.949) 37.346,82.433 ccw(c40.34,86.949) 38.481,81.86 cw(c38.393,81.622) 38.606,81.761 cw(c37.346,80.918) 38.862,80.918 38.862,80.391 ccw(c40.892,80.391) 40.892,78.361 48.551,78.361 ccw(c48.551,80.447) 48.871,78.386 ccw(c48.551,80.447) 50.026,78.972 52.879,81.824 53.107,82.052 ccw(c52.927,82.232) 53.117,82.063 cw(c54.649,80.7) 54.973,82.725 cw(c54.649,80.7) 56.536,81.506 cw(c54.649,80.7) 56.699,80.631 ccw(c56.953,80.622) 56.699,80.622 56.699,80.447 ccw(c58.785,80.447) 56.755,79.969 ccw(c58.785,80.447) 57.313,78.969 ccw(c58.962,80.901) 58.962,78.361 62.548,78.361 ccw(c62.548,80.901) 64.344,79.105 67.287,82.048 ccw(c64.848,84.486) 68.296,84.486 68.296,85.552 ccw(c64.848,85.552) 67.287,87.99 63.921,91.356 ccw(c61.482,88.918) 61.482,92.366 59.941,92.366 ccw(c59.941,88.918) 57.502,91.356 56.134,89.988 cw(c55.176,90.945) 55.176,89.591 55.118,89.591 cw(c55.118,90.829) 54.243,89.954 U301.20@54.121,90.076 U301.20@53.899,90.297 ; U301.20@51.822,91.101 52.059,90.864 ccw(c52.832,91.637) 52.693,90.553 53.281,90.553 cw(c53.281,89.679) U301.20@53.899,90.298
  Bottom Layer w0.254: S207.2@-12.066,109.275 S207.2@-12.066,109.855 ; S207.2@-12.026,109.275 1.756,95.494 cw(c-0.041,93.698) 2.499,93.698 S224.2@2.499,80.2 2.499,70.496 cw(c-0.041,70.496) -0.041,67.956 -104.796,67.956 ccw(c-104.796,66.675) -106.076,66.68 ccw(c-104.796,66.675) -106.076,66.67 ccw(c-104.796,66.675) -104.796,65.394 -9.566,65.394 cw(c-9.566,62.854) -7.026,62.854 S241.2@-7.026,61.15 -11.044,57.131 ccw(c-9.248,55.335) -11.788,55.335 S258.2@-11.788,42.1 -11.788,32.325 cw(c-14.328,32.325) -14.328,29.785 -89.737,29.785 ccw(c-89.737,28.504) -91.018,28.504 ccw(c-89.737,28.504) -89.737,27.223 -4.803,27.223 cw(c-4.803,24.683) -2.263,24.683 S272.2@-2.263,23.05 ; S283.2@-2.54,5.08 S283.2@-2.5,5.12 ; S283.2@-2.5,4.5 S283.2@-2.5,5.12 ; S272.2@-2.338,23.05 -2.338,22.975 -2.5,22.813 S283.2@-2.5,5.12
col9: S208.2 S225.2 S242.2 S259.2 S273.2 U301.19 | length 501.6
  Component Side w0.254: S225.2@-16.551,80.2 -16.551,81.245 cw(c-14.011,81.245) -14.011,83.785 35.995,83.785 cw(c35.995,82.604) 36.373,83.723 cw(c35.995,82.604) 36.832,83.437 ccw(c40.34,86.949) 37.031,83.249 ; 37.413,82.94 cw(c40.34,86.949) 37.031,83.249 ; U301.19@51.469,90.747 51.817,90.399 ccw(c52.542,91.123) 52.542,90.099 cw(c52.542,89.075) 53.266,89.799 U301.19@53.555,89.51 53.667,89.398 ccw(c54.864,90.595) 54.864,88.902 ccw(c54.864,90.908) 56.201,89.413 57.823,91.035 ; 57.824,91.036 cw(c59.941,88.918) 59.941,91.912 61.482,91.912 cw(c61.482,88.918) 63.599,91.036 ; 63.6,91.035 66.966,87.669 ; 66.966,82.369 66.833,82.236 cw(c66.147,82.922) 66.147,81.952 59.055,81.952 56.961,81.952 cw(c56.961,82.206) 56.748,82.067 ccw(c54.649,80.7) 54.303,83.181 ccw(c54.649,80.7) 52.786,82.374 cw(c52.597,82.544) 52.777,82.364 52.322,81.909 51.258,80.846 cw(c49.462,82.642) 49.462,80.102 47.945,80.102 cw(c47.945,81.578) 46.901,80.534 46.194,81.241 ccw(c44.398,79.445) 44.398,81.985 40.34,81.985 cw(c40.34,86.949) 37.031,83.249 ; 66.966,82.37 ccw(c64.848,84.486) 67.842,84.486 67.842,85.552 ccw(c64.848,85.552) 66.966,87.668
  Bottom Layer w0.254: S208.2@-31.076,109.275 -17.294,95.494 cw(c-19.091,93.698) -16.551,93.698 S225.2@-16.551,80.2 -16.551,70.95 cw(c-19.091,70.95) -19.091,68.41 -104.796,68.41 ccw(c-104.796,66.675) -106.53,66.678 ccw(c-104.796,66.675) -106.53,66.672 ccw(c-104.796,66.675) -104.796,64.94 -28.616,64.94 cw(c-28.616,62.4) -26.076,62.4 S242.2@-26.076,61.15 -30.094,57.131 ccw(c-28.298,55.335) -30.838,55.335 S259.2@-30.838,42.1 -30.838,32.779 cw(c-33.378,32.779) -33.378,30.239 -89.737,30.239 ccw(c-89.737,28.504) -91.472,28.504 ccw(c-89.737,28.504) -89.737,26.769 -23.853,26.769 cw(c-23.853,24.229) -21.313,24.229 S273.2@-21.313,23.05
col10: S209.2 S226.2 S243.2 S260.2 S274.2 U301.18 | length 445.8
  Component Side w0.254: S226.2@-35.601,80.2 -35.601,81.699 cw(c-33.061,81.699) -33.061,84.239 35.995,84.239 cw(c35.995,82.604) 37.151,83.76 ccw(c40.34,86.949) 40.34,82.439 44.398,82.439 cw(c44.398,79.445) 46.515,81.563 46.943,81.135 ccw(c48.739,82.931) 47.641,80.64 ccw(c48.739,82.931) 47.783,80.578 ccw(c47.879,80.813) 47.855,80.56 ccw(c47.945,81.578) 47.945,80.556 49.462,80.556 ccw(c49.462,82.642) 50.936,81.166 51.751,81.98 52.001,82.231 ; U301.18@51.115,90.394 51.848,89.661 ccw(c52.324,90.137) 52.324,89.464 cw(c52.324,89.113) 52.572,89.361 U301.18@52.989,88.944 ; 52.002,82.232 52.447,82.677 ccw(c52.268,82.857) 52.456,82.686 cw(c54.649,80.7) 52.738,82.958 cw(c54.649,80.7) 53.565,83.453 ; 52.738,82.959 cw(c54.649,80.7) 56.994,82.505 ccw(c57.195,82.66) 57.195,82.406 58.928,82.406 65.959,82.406 ccw(c65.959,83.376) 66.645,82.69 ccw(c64.848,84.486) 67.388,84.486 67.388,85.552 ccw(c64.848,85.552) 66.645,87.348 63.278,90.714 ccw(c61.482,88.918) 61.482,91.458 59.941,91.458 ccw(c59.941,88.918) 58.145,90.714 56.457,89.027 cw(c55.06,90.425) 55.06,88.448 54.188,88.448 cw(c54.188,90.143) U301.18@52.99,88.943
  Bottom Layer w0.254: S209.2@-50.166,109.275 S209.2@-50.166,109.855 ; S209.2@-50.126,109.275 -36.344,95.494 cw(c-38.141,93.698) -35.601,93.698 S226.2@-35.601,80.2 -35.601,71.404 cw(c-38.141,71.404) -38.141,68.864 -104.796,68.864 ccw(c-104.796,66.675) -106.984,66.678 ccw(c-104.796,66.675) -106.984,66.672 ccw(c-104.796,66.675) -104.796,64.486 -47.666,64.486 cw(c-47.666,61.946) -45.126,61.946 S243.2@-45.126,61.15 ; S243.2@-45.126,61 -49.144,56.981 ccw(c-47.348,55.185) -49.888,55.185 S260.2@-49.888,42.1 -49.888,33.233 cw(c-52.428,33.233) -52.428,30.693 -89.737,30.693 ccw(c-89.737,28.504) -91.926,28.504 ccw(c-89.737,28.504) -89.737,26.315 -42.902,26.315 cw(c-42.902,23.775) -40.362,23.775 S274.2@-40.362,23.05
col11: S210.2 S227.2 S244.2 S261.2 S275.2 U301.12 | length 353.9
  Component Side w0.254: S227.2@-54.651,80.2 -54.651,82.153 cw(c-52.111,82.153) -52.111,84.693 35.995,84.693 cw(c35.995,82.604) 37.472,84.081 ccw(c40.34,86.949) 40.34,82.893 45.886,82.893 ccw(c45.886,85.433) 47.682,83.637 U301.12@49.595,85.55 cw(c51.046,87.001) 48.994,87.001 U301.12@48.994,88.273
  Bottom Layer w0.254: S210.2@-78.701,109.275 -55.394,85.969 cw(c-57.191,84.173) -54.651,84.173 S227.2@-54.651,80.2 -54.651,71.858 cw(c-57.191,71.858) -57.191,69.318 -104.796,69.318 ccw(c-104.796,66.675) -107.438,66.679 ccw(c-104.796,66.675) -107.438,66.671 ccw(c-104.796,66.675) -104.796,64.032 -66.716,64.032 cw(c-66.716,61.492) -64.176,61.492 S244.2@-64.176,61.15 -68.194,57.131 ccw(c-66.398,55.335) -68.938,55.335 S261.2@-68.938,42.1 -68.938,33.687 cw(c-71.478,33.687) -71.478,31.147 -89.737,31.147 ccw(c-89.737,28.504) -92.38,28.504 ccw(c-89.737,28.504) -89.737,25.861 -61.953,25.861 cw(c-61.953,23.321) S275.2@-59.413,23.321 ; S275.2@-59.413,23.05 S275.2@-59.413,23.321 ; S275.2@-59.413,23.726 S275.2@-59.413,23.321
col12: S211.2 S228.2 S245.2 S262.2 S276.2 S284.2 U301.11 | length 316.6
  Component Side w0.254: S228.2@-73.701,80.2 -73.701,82.607 cw(c-71.161,82.607) -71.161,85.147 35.995,85.147 cw(c35.995,82.604) 37.793,84.402 ccw(c40.34,86.949) 40.34,83.347 43.971,83.347 ccw(c43.971,85.887) 45.767,84.091 U301.11@47.226,85.55 ccw(c45.775,87.001) 47.827,87.001 U301.11@47.827,88.273
  Bottom Layer w0.254: S211.2@-98.166,109.48 S211.2@-97.791,109.855 ; S211.2@-97.751,109.275 -74.444,85.969 cw(c-76.241,84.173) -73.701,84.173 S228.2@-73.701,80.2 -73.701,72.312 cw(c-76.241,72.312) -76.241,69.772 -104.796,69.772 ccw(c-104.796,66.675) -106.638,69.165 ccw(c-104.796,66.675) -107.878,66.971 ccw(c-104.796,66.675) -107.408,65.011 ccw(c-104.796,66.675) -105.715,63.718 ccw(c-104.796,66.675) -104.796,63.578 -85.654,63.578 cw(c-85.654,61.15) S245.2@-83.226,61.15 -87.244,57.131 ccw(c-85.448,55.335) -87.988,55.335 S262.2@-87.988,42.1 -87.988,33.778 cw(c-90.2,33.778) -89.796,31.603 cw(c-89.841,31.853) -89.833,31.6 ccw(c-89.737,28.504) -90.2,31.566 ccw(c-89.737,28.504) -92.36,30.151 ccw(c-89.737,28.504) -92.834,28.504 ccw(c-89.737,28.504) -89.737,25.407 -80.82,25.407 cw(c-80.82,23.05) S276.2@-78.463,23.05 -78.463,10.552 cw(c-81.003,10.552) -79.207,8.756 S284.2@-83.463,4.5
col13: S212.2 S229.2 S246.2 S263.2 S277.2 S285.2 U301.10 | length 322.4
  Component Side w0.254: S277.2@-119.081,23.55 -118.342,24.288 cw(c-116.546,22.492) -116.546,25.032 ccw(c-116.546,25.286) -116.542,25.032 -109.584,25.147 cw(c-109.556,23.55) -108.961,25.032 cw(c-109.556,23.55) -108.274,24.503 -107.765,23.822 ccw(c-107.562,23.974) -107.741,23.794 ccw(c-105.945,25.59) -105.945,23.05 S277.2@-104.556,23.05 ; S263.2@-118.951,42.1 cw(c-118.451,42.1) -118.451,42.6 S263.2@-112.045,42.6 S263.2@-112.038,42.6 ; S229.2@-92.751,80.2 -92.751,83.061 cw(c-90.211,83.061) -90.211,85.601 35.995,85.601 cw(c35.995,82.604) 38.114,84.723 ccw(c40.34,86.949) 40.34,83.801 43.79,83.801 ccw(c43.79,85.273) 44.755,84.161 ; 44.831,84.232 cw(c43.79,85.273) 44.755,84.161 ; U301.10@47.474,88.626 47.412,88.565 ccw(c48.474,87.503) 46.972,87.503 46.972,86.82 cw(c45.908,86.82) 46.661,86.067 44.755,84.161
  Bottom Layer w0.254: S212.2@-116.841,109.855 -116.327,109.341 S212.2@-116.327,109.275 ; S212.2@-116.801,109.275 -93.494,85.969 cw(c-95.291,84.173) -92.751,84.173 S229.2@-92.751,80.2 -92.751,72.766 cw(c-95.291,72.766) -95.291,70.226 -104.796,70.226 ccw(c-104.796,66.675) -106.366,69.86 ccw(c-104.796,66.675) -108.232,67.571 ccw(c-104.796,66.675) -108.042,65.237 ccw(c-104.796,66.675) -106.749,63.71 ccw(c-104.796,66.675) -104.796,63.124 -104.25,63.124 cw(c-104.25,61.15) S246.2@-102.276,61.15 -102.276,56.388 cw(c-104.816,56.388) -104.816,53.848 -116.411,53.848 ccw(c-116.411,51.308) -118.951,51.308 S263.2@-118.951,42.1 -118.951,23.68 cw(c-119.081,23.68) S277.2@-119.081,23.55 -119.081,17.358 ccw(c-116.541,17.358) -118.337,15.562 S285.2@-107.275,4.5